# Altium PCB BOARD.PcbDoc
Units mm, origin at the board's own origin, x right, y up, seen from the top; angles counter-clockwise.
Board outline 18 x 20 mm, 2 copper layers (Top Layer, Bottom Layer), stack 0.46 mm thick; 49 components, 31 nets, 117 pads, 0 vias.
Unrouted connection lines stored in the file: 84.
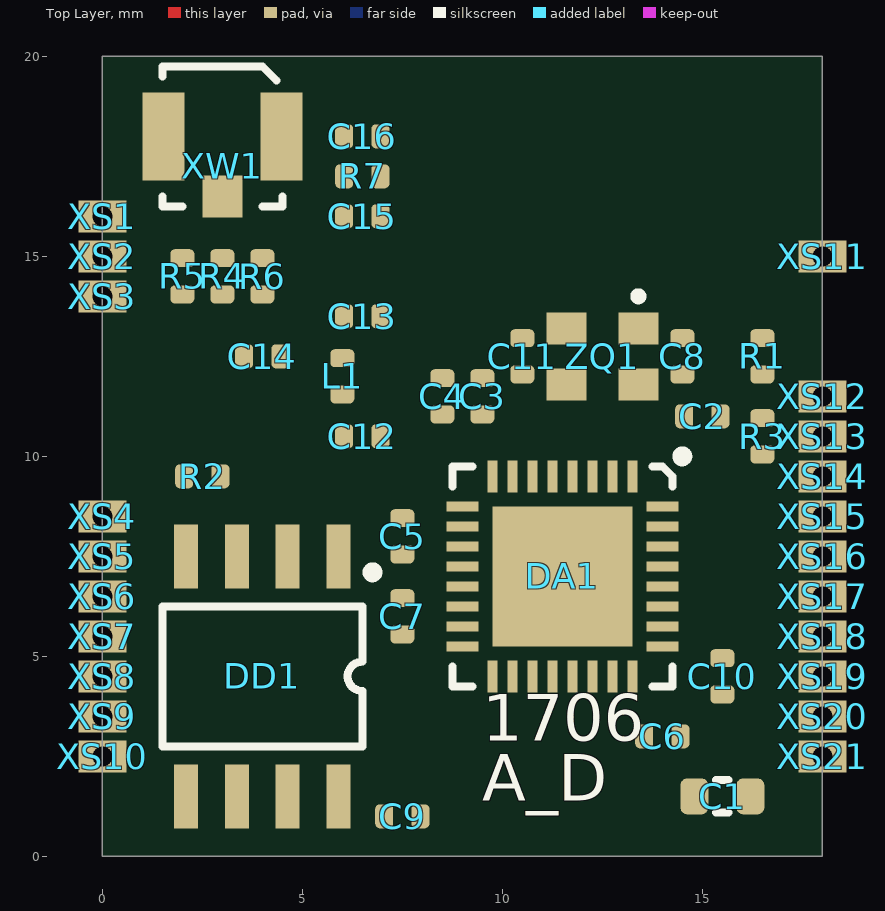
[diagram p0: Top Layer view]
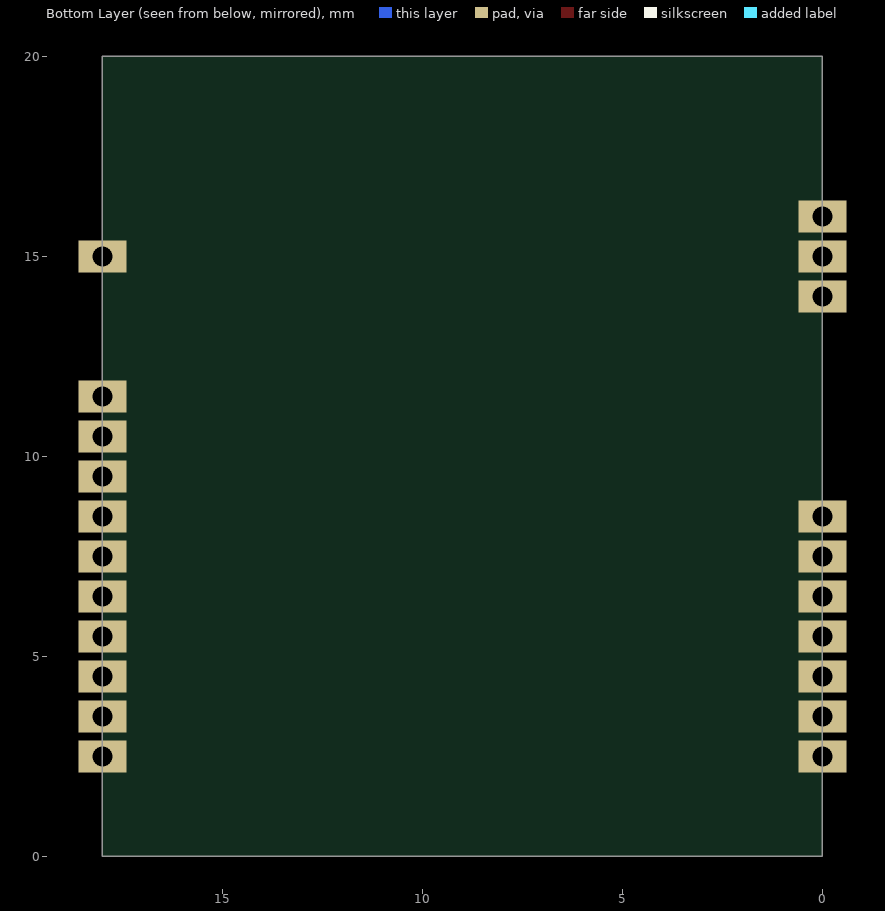
[diagram p1: Bottom Layer view, seen from below]

## Layer stack, top to bottom
Top Solder: solder mask 0.01, Solder Resist, Dk 3.5
Top Layer: signal copper 0.03
Dielectric1: core 0.4, FR-4, Dk 4.2
Bottom Layer: signal copper 0.03
Bottom Solder: solder mask 0.01, Solder Resist, Dk 3.5

## Board outline
0,0 18,0 18,20 0,20

## Design rules (kind name [scope] priority, off if disabled: settings)
Clearance Clearance_ANT [InNetClass('ANT_Class') vs InPolygon] p1: gap=0.6
Clearance Clearance_GND_Poly [(InNet('GND') AND InPolygon )] p2: gap=0.2
Clearance [All] p3: gap=0.15
ComponentClearance [All] p1 off: gap=0.25 collisioncheckmode=3 verticalgap=0.25 showdistances=FALSE
DiffPairsRouting [All] p1: maxlimit=0.4 minlimit=0.15 mostfreqgap=0.25 toplayer_minwidth=0.2 toplayer_maxwidth=0.4 toplayer_prefwidth=0.25 bottomlayer_minwidth=0.2 bottomlayer_maxwidth=0.4 bottomlayer_prefwidth=0.25 maxuncoupledlength=12
Height [All] p1: minheight=0 maxheight=25 prefheight=25
HoleSize [All] p1: absolutevalues=TRUE maxlimit=6 minlimit=0.3 maxpercent=80.000 minpercent=20.000
HoleToHoleClearance [All] p1: gap=0.25 allowstackedmicrovias=TRUE
MinimumSolderMaskSliver [All] p1 off: minsoldermaskwidth=0.254
PlaneClearance [All] p1: clearance=0.5
PlaneConnect [All] p1: planeconnectstyle=Relief reliefexpansion=0.5 reliefentries=4 reliefconductorwidth=0.25 reliefairgap=0.25
PolygonConnect PolygonConnect_XW1 [InComponent('XW1') vs IsPolygon] p1: connectstyle=Direct reliefconductorwidth=0.254 reliefentries=4 polygonreliefangle="90 Angle" airgapwidth=0.254
PolygonConnect PolygonConnect_Components [InComponent('C*') OR InComponent('R*') OR InComponent('NR*') OR InComponent('DA*') OR InComponent('DD*') OR InComponent('HL*')] p2: connectstyle=Relief reliefconductorwidth=0.2 reliefentries=4 polygonreliefangle="90 Angle" airgapwidth=0.25
PolygonConnect PolygonConnect_Connectors [All vs (InPadClass('All Pads'))] p3: connectstyle=Relief reliefconductorwidth=0.6 reliefentries=4 polygonreliefangle="90 Angle" airgapwidth=0.3
PolygonConnect PolygonConnect_Via [All] p4: connectstyle=Direct reliefconductorwidth=0.254 reliefentries=4 polygonreliefangle="90 Angle" airgapwidth=0.254
RoutingCorners [All] p1: cornerstyle=45-Degree minsetback=1.5 maxsetback=3.5
RoutingVias [All] p1: holewidth=0.6 width=1.2 viastyle="Through Hole" minholewidth=0.3 minwidth=0.6 maxholewidth=1 maxwidth=2
SMDEntry [All] p1: side=TRUE corner=TRUE anyangle=TRUE
SilkToSilkClearance [All] p1 off: silktosilkclearance=0.254
SilkToSolderMaskClearance [IsPad] p1 off: minsilkscreentomaskgap=0.254 clearancetoexposedcopper=TRUE
SolderMaskExpansion [All] p1: expansion=0.1
Width [All] p1: maxlimit=8 minlimit=0.2 preferedwidth=0.6
Width Width_TrackEnds [All] p2 off: maxlimit=0.25 minlimit=0.25 preferedwidth=0.25 checkconnectedcopper=TRUE
19 further rules are at their usual default settings.

## Components (designator, comment, footprint, x,y, rotation, side; value= is the part's Value field where it differs from the comment)
C1 "Capacitor" C0603_L 15.5,1.5 r0 top
C2 "Capacitor" C0402_L 15,11 r180 top
C3 "Capacitor" C0402_L 9.5,11.5 r270 top
C4 "Capacitor" C0402_L 8.5,11.5 r270 top
C5 "Capacitor" C0402_L 7.5,8 r90 top
C6 "Capacitor" C0402_L 14,3 r180 top
C7 "Capacitor" C0402_L 7.5,6 r270 top
C8 "Capacitor" C0402_L 14.5,12.5 r90 top
C9 "Capacitor" C0402_L 7.5,1 r180 top
C10 "Capacitor" C0402_L 15.5,4.5 r90 top
C11 "Capacitor" C0402_L 10.5,12.5 r270 top
C12 "Capacitor" C0402_L 6.5,10.5 r180 top
C13 "Capacitor" C0402_L 6.5,13.5 r180 top
C14 "Capacitor" C0402_L 4,12.5 r0 top
C15 "Capacitor" C0402_L 6.5,16 r180 top
C16 "Capacitor" C0402_L 6.5,18 r0 top
DA1 "RTL8710BN" QFN-32 11.5,7 r270 top
DD1 "W25Q-Series" SOIC-8 4,4.5 r180 top
L1 "Coil" L0402_L 6,12 r90 top
R1 "Resistor" R0402_L 16.5,12.5 r90 top
R2 "Resistor" R0402_L 2.5,9.5 r0 top
R3 "Resistor" R0402_L 16.5,10.5 r90 top
R4 "Resistor" R0402_L 3,14.5 r90 top
R5 "Resistor" R0402_L 2,14.5 r90 top
R6 "Resistor" R0402_L 4,14.5 r90 top
R7 "Resistor" R0402_L 6.5,17 r0 top
XS1 "PCB-SPIN" PCB-SPIN 0,16 r90 top locked
XS2 "PCB-SPIN" PCB-SPIN 0,15 r90 top locked
XS3 "PCB-SPIN" PCB-SPIN 0,14 r90 top locked
XS4 "PCB-SPIN" PCB-SPIN 0,8.5 r90 top locked
XS5 "PCB-SPIN" PCB-SPIN 0,7.5 r90 top locked
XS6 "PCB-SPIN" PCB-SPIN 0,6.5 r90 top locked
XS7 "PCB-SPIN" PCB-SPIN 0,5.5 r90 top locked
XS8 "PCB-SPIN" PCB-SPIN 0,4.5 r90 top locked
XS9 "PCB-SPIN" PCB-SPIN 0,3.5 r90 top locked
XS10 "PCB-SPIN" PCB-SPIN 0,2.5 r90 top locked
XS11 "PCB-SPIN" PCB-SPIN 18,15 r90 top locked
XS12 "PCB-SPIN" PCB-SPIN 18,11.5 r90 top locked
XS13 "PCB-SPIN" PCB-SPIN 18,10.5 r90 top locked
XS14 "PCB-SPIN" PCB-SPIN 18,9.5 r90 top locked
XS15 "PCB-SPIN" PCB-SPIN 18,8.5 r90 top locked
XS16 "PCB-SPIN" PCB-SPIN 18,7.5 r90 top locked
XS17 "PCB-SPIN" PCB-SPIN 18,6.5 r90 top locked
XS18 "PCB-SPIN" PCB-SPIN 18,5.5 r90 top locked
XS19 "PCB-SPIN" PCB-SPIN 18,4.5 r90 top locked
XS20 "PCB-SPIN" PCB-SPIN 18,3.5 r90 top locked
XS21 "PCB-SPIN" PCB-SPIN 18,2.5 r90 top locked
XW1 "Con-RF-M" 1909763-1 3,18 r0 top
ZQ1 "Crystal" SX-2520 12.5,12.5 r180 top

## Footprints (in the part's own frame and the unit in brackets; to place one, negate y for a bottom-side part, rotate by r counter-clockwise, add the part's x,y. Pads: shape width x height; smd on the part's side, far side on the other; paste and mask are expansions set on the pad)
1909763-1 [mm] "IPX"
  rect 1x1.05 smd: 1(0,-1.5)
  rect 1.05x2.2 smd: 2(-1.475,0) 2(1.475,0)
  silkscreen extent -1.5,-1.75 1.5,1.75, body extent -1.5,-1.55 1.5,1.55, height 1.2
C0402_L [mm] "Chip Capacitor; Body 1.0 x 0.5 mm (LxW typ)"
  rrect50% 0.45x0.6 smd: 1(-0.452,0) 2(0.452,0)
  body extent -0.5,-0.25 0.5,0.25, height 0.61
C0603_L [mm] "Chip Capacitor; Body 1.6 x 0.8 mm (LxW typ)"
  rrect50% 0.7x0.9 smd: 1(-0.7,0) 2(0.7,0)
  silkscreen extent -0.15,-0.41 0.15,0.41, body extent -0.79,-0.41 0.81,0.39, height 0.8
L0402_L [mm] "Chip Coil; Body 1.0 x 0.5 mm (LxW typ)"
  rrect50% 0.45x0.6 smd mask+0.05: 1(-0.452,0) 2(0.452,0)
  Top Layer pour cut-out: -0.325,0.3 0.325,0.3 0.325,-0.3 -0.325,-0.3
  body extent -0.5,-0.3 0.5,0.3, height 0.5
PCB-SPIN [mm]
  rect 0.8x1.2 hole 0.5: 1(0,0)
QFN-32 [mm]
  rect 0.8x0.25 smd: 1(-2.5,1.75) 2(-2.5,1.25) 3(-2.5,0.75) 4(-2.5,0.25) 5(-2.5,-0.25) 6(-2.5,-0.75) 7(-2.5,-1.25) 8(-2.5,-1.75) 17(2.5,-1.75) 18(2.5,-1.25) 19(2.5,-0.75) 20(2.5,-0.25) 21(2.5,0.25) 22(2.5,0.75) 23(2.5,1.25) 24(2.5,1.75)
  rect 0.25x0.8 smd: 9(-1.75,-2.5) 10(-1.25,-2.5) 11(-0.75,-2.5) 12(-0.25,-2.5) 13(0.25,-2.5) 14(0.75,-2.5) 15(1.25,-2.5) 16(1.75,-2.5) 25(1.75,2.5) 26(1.25,2.5) 27(0.75,2.5) 28(0.25,2.5) 29(-0.25,2.5) 30(-0.75,2.5) 31(-1.25,2.5) 32(-1.75,2.5)
  rect 3.5x3.5 smd: 33(0,0)
  silkscreen extent -3.12,-2.75 2.75,3.13, body extent -2.51,-2.51 2.51,2.51, height 0.82
R0402_L [mm] "Chip Resistor; Body 1.0 x 0.5 mm (LxW typ)"
  rrect50% 0.45x0.6 smd: 1(-0.452,0) 2(0.452,0)
  body extent -0.5,-0.25 0.5,0.25, height 0.4
SOIC-8 [mm] "4320.8-А Small Outline; 8 Leads; Body Width 3.9 mm; Pitch 1.27 mm"
  rect 0.6x1.6 smd: 1(-1.905,-3) 2(-0.635,-3) 3(0.635,-3) 4(1.905,-3) 5(1.905,3) 6(0.635,3) 7(-0.635,3) 8(-1.905,3)
  silkscreen extent -2.88,-2.72 2.5,1.75, body extent -2.5,-3.01 2.5,3.01, height 1.75
SX-2520 [mm]
  rect 1x0.8 smd: 1(-0.9,-0.7) 2(0.9,-0.7) 3(0.9,0.7) 4(-0.9,0.7)
  silkscreen extent -1,-1.6 -0.8,-1.4, body extent -1.25,-1 1.25,1, height 0.55

## Part data
C1: library part GRM188R61A106KE69D
C2 C3 C4 C5 C6 C7 C9 C10: library part GRM155R71C104KA88D
C8 C11: library part GRM1555C1H4R0CZ01D
C12 C13 C14 C15 C16: library part GRM1555C1H100JA01D
DD1: library part W25Q16DVSNIG
L1: library part LQG15HS2N2S02D
R1 R2 R3: library part RC0402JR-074K7L
R4 R5 R6 R7: library part RC0402JR-070RL
XW1: library part 1909763-1
ZQ1: library part CX2520DB40000D0FLJCC

## Nets (pads, with @x,y where several pads share a name; then routed paths per layer and width w, separated by ;. In a path a pad name is that pad's centre, name@x,y a point inside that pad or via, vN(x,y) a via of type N, cw(c..) or ccw(c..) an arc to the next point about the centre after c; other vN are vias at no path point)
CHIP_EN: DA1.12 R2.1 XS5.1
FLASH_CLK: DA1.22 DD1.6
FLASH_IO0: DA1.21 DD1.5
FLASH_IO1: DA1.19 DD1.2
FLASH_IO2: DA1.20 DD1.3
FLASH_IO3: DA1.23 DD1.7
FLASH_NCS: DA1.18 DD1.1
GND: C1.1 C2.1 C3.1 C4.1 C5.1 C6.1 C7.1 C8.1 C9.1 C10.1 C11.1 C12.1 C13.1 C14.1 C15.1 C16.1 DA1.7 DA1.33 DD1.4 XS1.1 XS3.1 XS10.1 XS11.1 XS20.1 XW1.2
GPIO0: DA1.16 XS8.1
GPIO5: DA1.28 XS18.1
GPIO12: DA1.17 XS9.1
GPIO14: DA1.13 XS6.1
GPIO15: DA1.14 XS7.1
GPIO18: DA1.29 XS17.1
GPIO19: DA1.30 XS16.1
GPIO22: DA1.31 XS15.1
GPIO23: DA1.32 XS14.1
GPIO29: DA1.2 R1.1 XS12.1
GPIO30: DA1.1 R3.1 XS13.1
NC: XS4.1
NetC8_2: C8.2 DA1.4 ZQ1.1
NetC11_2: C11.2 DA1.5 ZQ1.3
NetC13_2: C13.2 C14.2 L1.2 R4.1 R5.1 R6.1
NetC15_2: C15.2 R6.2 R7.1
NetC16_2: C16.2 R7.2
RF: C12.2 DA1.9 L1.1
RF_CON: R4.2 XW1.1
RF_EXT: R5.2 XS2.1
VBAT: DA1.27 XS19.1
VCC1P2: C7.2 C10.2 DA1.15 DA1.26
VCC3P3: C1.2 C2.2 C3.2 C4.2 C5.2 C6.2 C9.2 DA1.3 DA1.6 DA1.8 DA1.10 DA1.11 DA1.24 DA1.25 DD1.8 R1.2 R2.2 R3.2 XS21.1
pads on no net: ZQ1.2 ZQ1.4

## Silkscreen, mask and mechanical layers (free items; w line width, h text height)
Top Overlay:
  text "1706" at 9.5,2.5 h2
  text "A_D" at 9.5,1 h2
1 - Board Outline:
  the board outline again, w0.1
11 - Dementions (Top):
  lines w0.254: -2.508,1.524 -2,0 ; -2.508,18.476 -2,20 ; -2.254,0 -1.746,0 ; -2.254,20 -1.746,20 ; -2,4.896 -2,0 ; -2,15.104 -2,20 ; -1.492,1.524 -2,0 ; -1.492,18.476 -2,20 ; 0,-2.254 0,-1.746 ; 1.524,-2.508 0,-2 ; 1.524,-1.492 0,-2 ; 4.023,-2 0,-2 ; 13.977,-2 18,-2 ; 16.476,-2.508 18,-2 ; 16.476,-1.492 18,-2 ; 18,-2.254 18,-1.746
  text "20 (mm)" at -1.086,5.15 h1.52 r90
  text "18 (mm)" at 4.277,-2.914 h1.52